# EAGLE board diffamp (EAGLE 8.3.1)
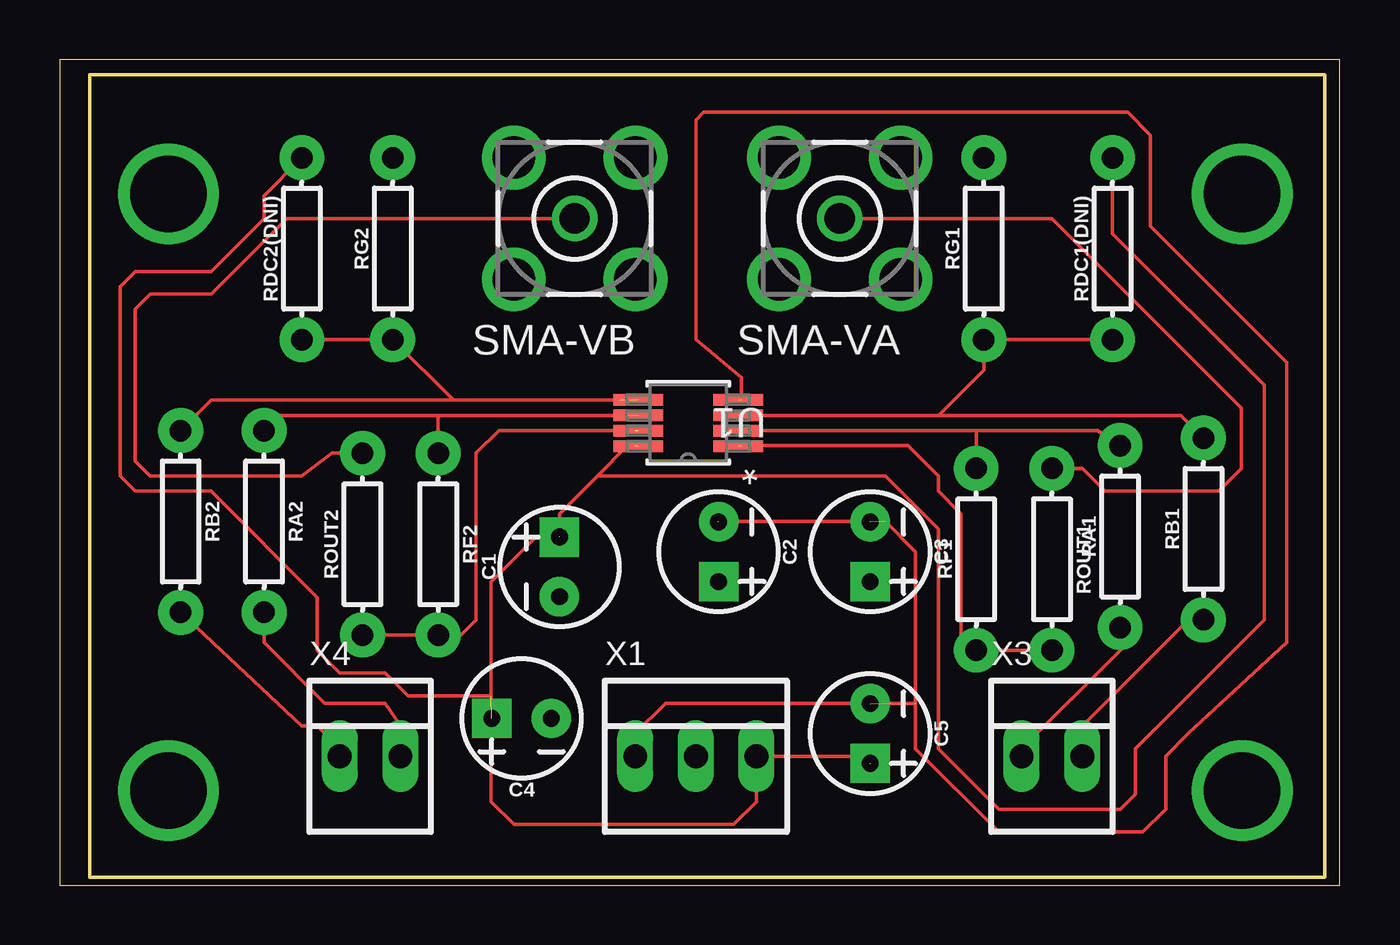
[diagram p0: board, top side]
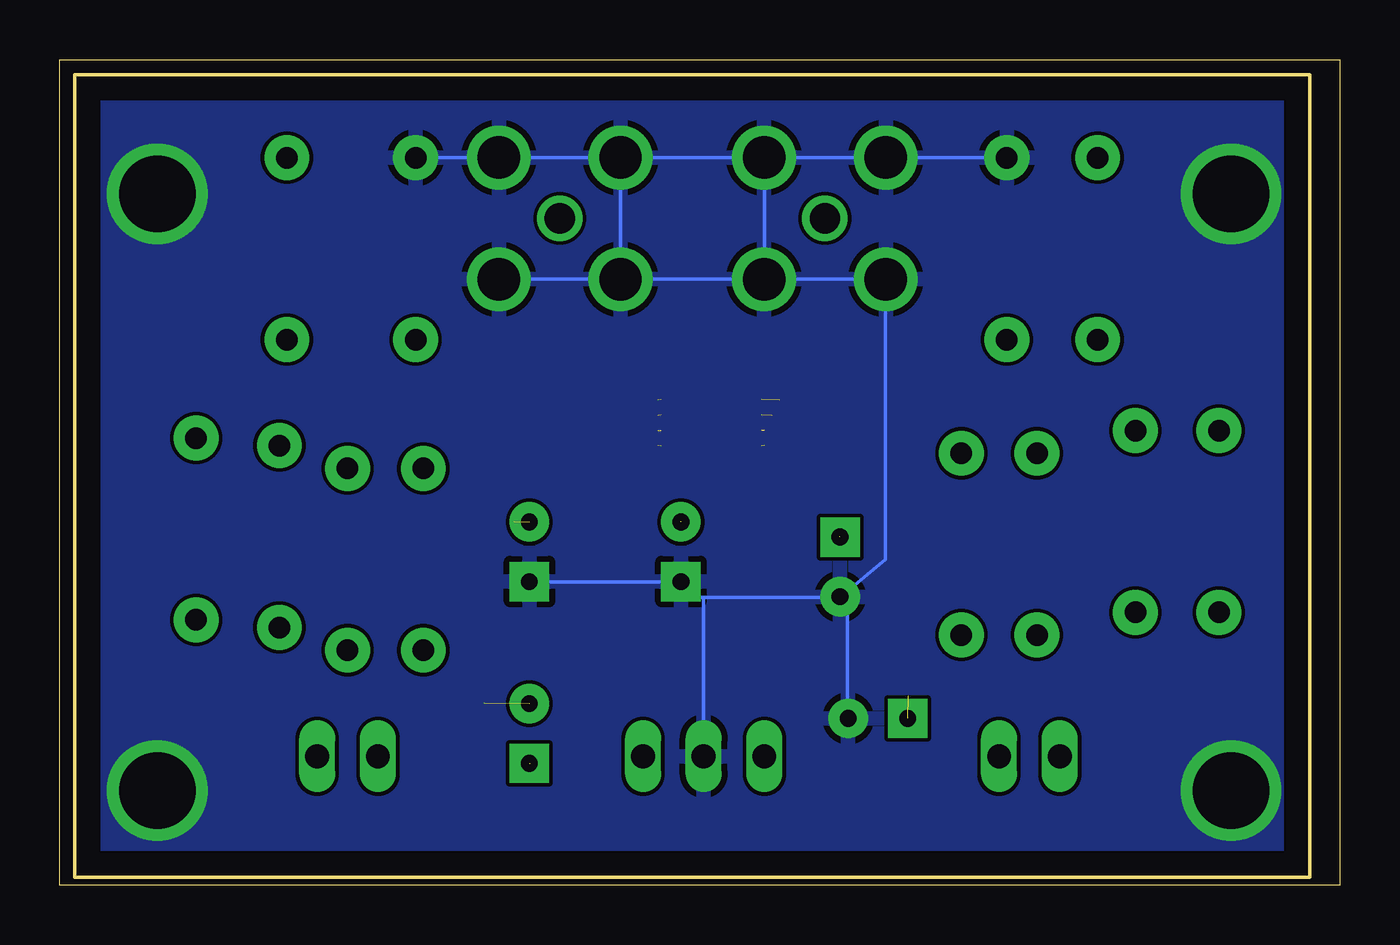
[diagram p1: board, bottom side, seen from below]

Size 53.65 x 34.59 mm. Coordinates in mm from the lower left corner, seen from the top.
Outline: 53.65,0 53.65,34.59 0,34.59 0,0 53.65,0
Outline: 53.01,0.32 53.01,33.97 1.26,33.97 1.26,0.32 53.01,0.32
Copper layers (1*16): Top 0.035mm / dielectric 1.5mm / Bottom 0.035mm
Design rules "default": minimum track width 6mil, minimum drill 0.35mm, track to track 6mil, track to pad 6mil, pad to pad 6mil, via to via 6mil, smd to smd 6mil, copper to edge 40mil, drill to drill 6mil, minimum pad ring 10mil, minimum via ring 8mil, stop-mask expansion 4mil, vias tented up to drill 0mil, thermal gap 10mil

## Footprints (pad centres in the part's own frame; a part is rotated, then mirrored left to right if it is on the bottom)
CPOL-RADIAL-2.5MM-5MM = drill 0.7 pad 1.651 square: 1 1.25,0 | drill 0.7 pad 1.651: 2 -1.25,0
AXIAL-0.3 = drill 0.9 pad 1.88: P$1 -3.81,0; P$2 3.81,0
BU-SMA-V = drill 1.27: 1 0,0 | drill 1.778: 2 -2.55,2.55; 3 2.55,2.55; 4 2.55,-2.55; 5 -2.55,-2.55
RM_8-M = smd 2.083 x 0.483: 1 -2.095,0.975; 2 -2.095,0.325; 3 -2.095,-0.325; 4 -2.095,-0.975; 5 2.095,-0.975; 6 2.095,-0.325; 7 2.095,0.325; 8 2.095,0.975
22-23-2031 = drill 1 long: 1 -2.54,0; 2 0,0; 3 2.54,0
22-23-2021 = drill 1 long: 1 -1.27,0; 2 1.27,0

## Placement (x,y rotation side)
C1  10uF  [CPOL-RADIAL-2.5MM-5MM]  20.95,13.33 90 top
C2  10uF  [CPOL-RADIAL-2.5MM-5MM]  27.61,13.97 270 top
C3  0.1uF  [CPOL-RADIAL-2.5MM-5MM]  33.96,13.97 270 top
C4  0.1uF  [CPOL-RADIAL-2.5MM-5MM]  19.36,6.99 180 top
C5  10nF  [CPOL-RADIAL-2.5MM-5MM]  33.96,6.35 270 top
RA1  500  [AXIAL-0.3]  44.44,14.61 90 top
RA2  500  [AXIAL-0.3]  8.56,15.24 270 top
RB1  500  [AXIAL-0.3]  47.93,14.92 90 top
RB2  500  [AXIAL-0.3]  5.07,15.24 270 top
RDC1(DNI)  1k  [AXIAL-0.3]  44.12,26.67 90 top
RDC2(DNI)  1k  [AXIAL-0.3]  10.15,26.67 90 top
RF1  1k  [AXIAL-0.3]  38.41,13.65 90 top
RF2  1k  [AXIAL-0.3]  15.86,14.29 270 top
RG1  1k  [AXIAL-0.3]  38.73,26.67 90 top
RG2  1k  [AXIAL-0.3]  13.96,26.67 90 top
ROUT1  0  [AXIAL-0.3]  41.58,13.65 270 top
ROUT2  0  [AXIAL-0.3]  12.69,14.29 90 top
SMA-VA  BU-SMA-V  [BU-SMA-V]  32.69,27.94 180 top
SMA-VB  BU-SMA-V  [BU-SMA-V]  21.58,27.94 180 top
U1  ADA4807-2ARMZRM_8-M  [RM_8-M]  26.34,19.37 180 top
X1  22-23-2031  [22-23-2031]  26.66,5.4 0 top
X3  22-23-2021  [22-23-2021]  41.58,5.4 0 top
X4  22-23-2021  [22-23-2021]  13.01,5.4 0 top

## Library data of the parts
C1-C5 = SparkFun-Capacitors; PROD_ID: CAP-08440
RA1 RA2 RB1 RB2 RDC1(DNI) RDC2(DNI) RF1 RF2 RG1 RG2 ROUT1 ROUT2 = SparkFun-Resistors
SMA-VA SMA-VB = con-coax; OC_FARNELL: unknown; OC_NEWARK: unknown
U1 = ADA4807-2; MANUFACTURER_PART_NUMBER: ADA48072ARMZ; VENDOR: Analog Devices Inc
X1 = con-molex; MF: MOLEX; MPN: 22-23-2031; OC_FARNELL: 1462950; OC_NEWARK: 30C0862
X3 X4 = con-molex; MF: MOLEX; MPN: 22-23-2021; OC_FARNELL: 1462926; OC_NEWARK: 25C3832

## Nets
+5V: C1.1 C4.1 C5.1 RDC1(DNI).P$2 RDC2(DNI).P$2 U1.8 X1.3
+IN1: RB1.P$2 RDC1(DNI).P$1 RG1.P$1 U1.3
+IN2: RB2.P$1 RDC2(DNI).P$1 RG2.P$1 U1.5
-5V: C2.2 C3.2 C5.2 U1.4 X1.1
-IN1: RA1.P$2 RF1.P$2 U1.2
-IN2: RA2.P$1 RF2.P$1 U1.6
DAC-A1: RA1.P$1 X3.1
DAC-A2: RB1.P$1 X3.2
DAC-B1: RA2.P$2 X4.2
DAC-B2: RB2.P$2 X4.1
GND: C1.2 C2.1 C3.1 C4.2 RG1.P$2 RG2.P$2 SMA-VA.2 SMA-VA.3 SMA-VA.4 SMA-VA.5 SMA-VB.2 SMA-VB.3 SMA-VB.4 SMA-VB.5 X1.2
VOUT1: RF1.P$1 ROUT1.P$2 U1.1
VOUT2: RF2.P$2 ROUT2.P$1 U1.7
VSMA1: ROUT1.P$1 SMA-VA.1
VSMA2: ROUT2.P$2 SMA-VB.1

## Tracks (layer width: path | path; a pad name or v marks a point on that pad's centre or on a via)
+5V  (4 unrouted)
  Top 0.152: 24.12,18.42 23.8,18.42 22.53,17.14 | 18.09,7.94 18.09,12.7 19.99,14.61 20.95,14.61 20.95,15.56 22.53,17.14 | 18.09,7.94 18.09,3.49 19.04,2.54 28.25,2.54 29.2,3.49 X1.3 33.65,5.4 33.96,5.08 | 18.09,7.94 14.6,7.94 13.64,8.89 11.74,8.89 10.78,9.84 10.78,12.07 6.34,16.51 3.17,16.51 2.53,17.14 2.53,25.08 3.17,25.72 6.34,25.72 8.56,27.94 8.56,28.89 RDC2(DNI).P$2 | 22.53,17.14 34.6,17.14 36.82,14.92 36.82,5.71 39.36,3.18 44.44,3.18 45.07,3.81 45.07,5.71 50.47,11.11 50.47,20.96 44.12,27.31 RDC1(DNI).P$2
+IN1  (1 unrouted)
  Top 0.152: RB1.P$2 46.98,19.68 36.82,19.68 | 28.57,19.68 36.82,19.68 | RDC1(DNI).P$1 RG1.P$1 38.73,21.59 36.82,19.68
+IN2  (1 unrouted)
  Top 0.152: 23.49,20.32 16.5,20.32 | RDC2(DNI).P$1 RG2.P$1 16.5,20.32 | RB2.P$1 6.34,20.32 16.5,20.32
-5V  (4 unrouted)
  Top 0.152: 27.61,15.24 34.6,15.24 35.87,13.97 35.87,7.62 | 35.87,7.62 35.87,5.71 39.36,2.22 45.39,2.22 46.34,3.18 46.34,5.4 47.3,6.35 51.43,10.16 51.43,21.91 45.71,27.62 45.71,31.43 44.76,32.39 26.98,32.39 26.66,32.07 26.66,22.86 28.57,21.27 28.57,20.32 | 35.87,7.62 25.39,7.62 24.12,6.35 X1.1
-IN1  (1 unrouted)
  Top 0.152: RA1.P$2 43.49,19.05 38.41,19.05 | 28.57,19.05 38.41,19.05 | 38.41,19.05 RF1.P$2
-IN2  (1 unrouted)
  Top 0.152: 23.8,19.68 15.86,19.68 | RF2.P$1 15.86,19.68 | 15.86,19.68 9.2,19.68 RA2.P$1
DAC-A1
  Top 0.152: RA1.P$1 44.44,9.84 40.31,5.71 X3.1
DAC-A2
  Top 0.152: RB1.P$1 47.3,11.11 42.85,6.67 X3.2
DAC-B1
  Top 0.152: RA2.P$2 8.56,10.16 11.1,7.62 13.64,7.62 14.28,6.67 X4.2
DAC-B2
  Top 0.152: RB2.P$2 10.15,6.67 10.78,6.67 11.74,5.71 X4.1
GND  (via drill 3.2)
  Bottom 0.152: RG2.P$2 SMA-VB.5 | SMA-VB.5 SMA-VB.2 | SMA-VB.2 SMA-VA.3 | SMA-VA.3 SMA-VA.4 | SMA-VA.4 SMA-VB.5 | SMA-VA.4 RG1.P$2 | 20.95,12.07 19.04,13.65 19.04,25.4 SMA-VB.2 | 26.66,7.62 X1.2 26.66,12.07 | 20.95,12.07 26.66,12.07 | 33.96,12.7 27.61,12.7 26.98,12.07 26.66,12.07 | 20.63,6.99 20.63,11.75 20.95,12.07 | SMA-VA.3 SMA-VA.2
  other vias: 4.56,3.96 4.56,28.96 49.56,28.96 49.56,3.96
  pour Bottom: 1.26,33.97 1.26,0.32 53.01,0.32 53.01,33.97
VOUT1  (1 unrouted)
  Top 0.152: 28.57,18.42 35.55,18.42 36.82,17.14 36.82,16.51 37.77,15.56 37.77,10.48 RF1.P$1 ROUT1.P$2
VOUT2  (1 unrouted)
  Top 0.152: 24.12,19.05 18.4,19.05 17.45,18.1 17.45,11.11 16.82,10.48 RF2.P$2 ROUT2.P$1
VSMA1
  Top 0.152: SMA-VA.1 41.58,27.94 49.52,20 49.52,17.46 48.57,16.51 43.81,16.51 42.85,17.46 ROUT1.P$1
VSMA2
  Top 0.152: SMA-VB.1 9.52,27.94 6.34,24.76 3.8,24.76 3.17,24.13 3.17,17.78 3.8,17.14 10.15,17.14 11.42,18.1 ROUT2.P$2